# EAGLE board PCB-2.0 v40 (EAGLE 9.7.0)
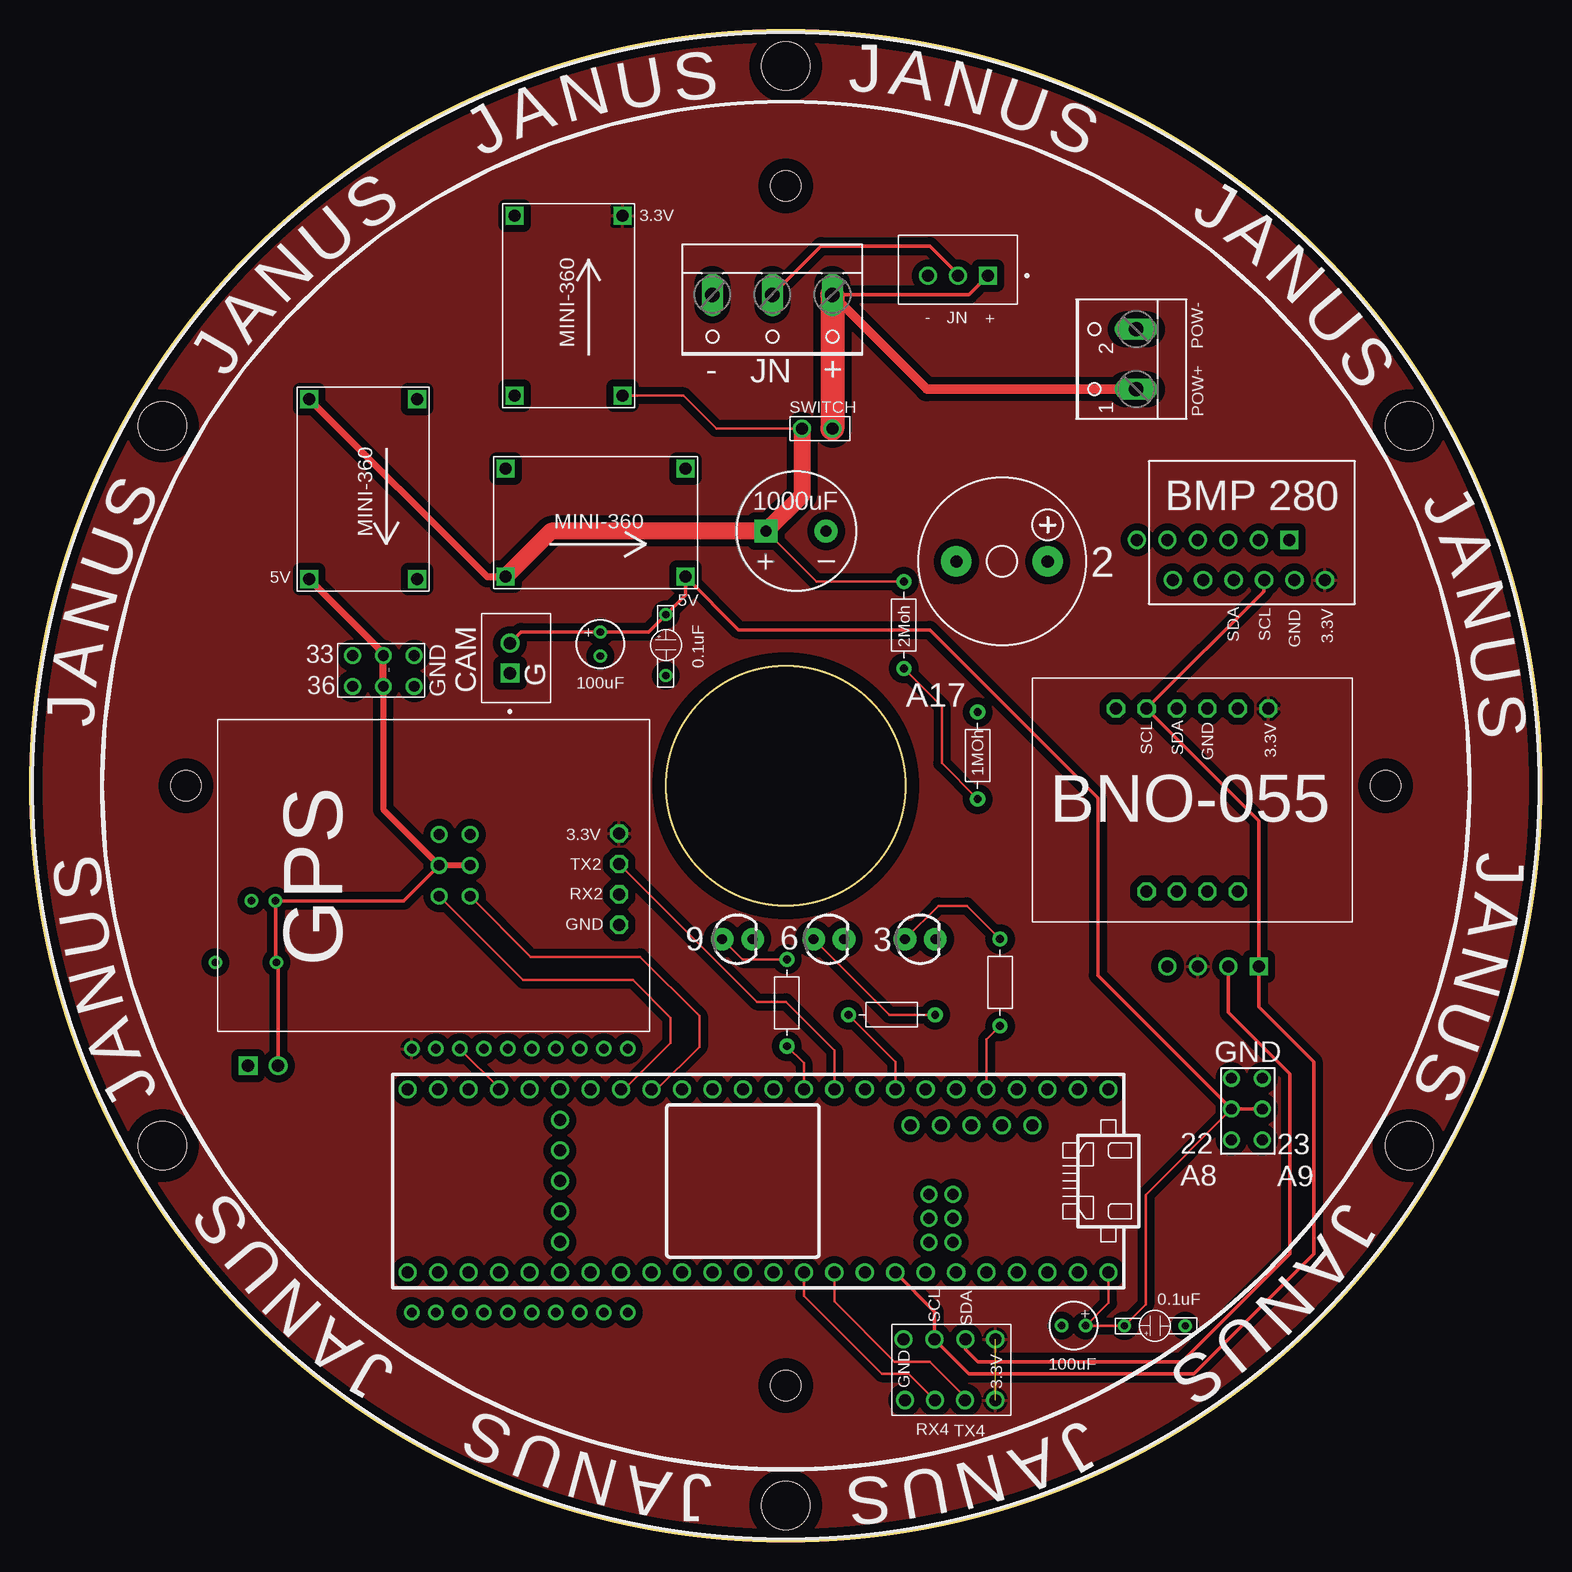
[diagram p0: board, top side]
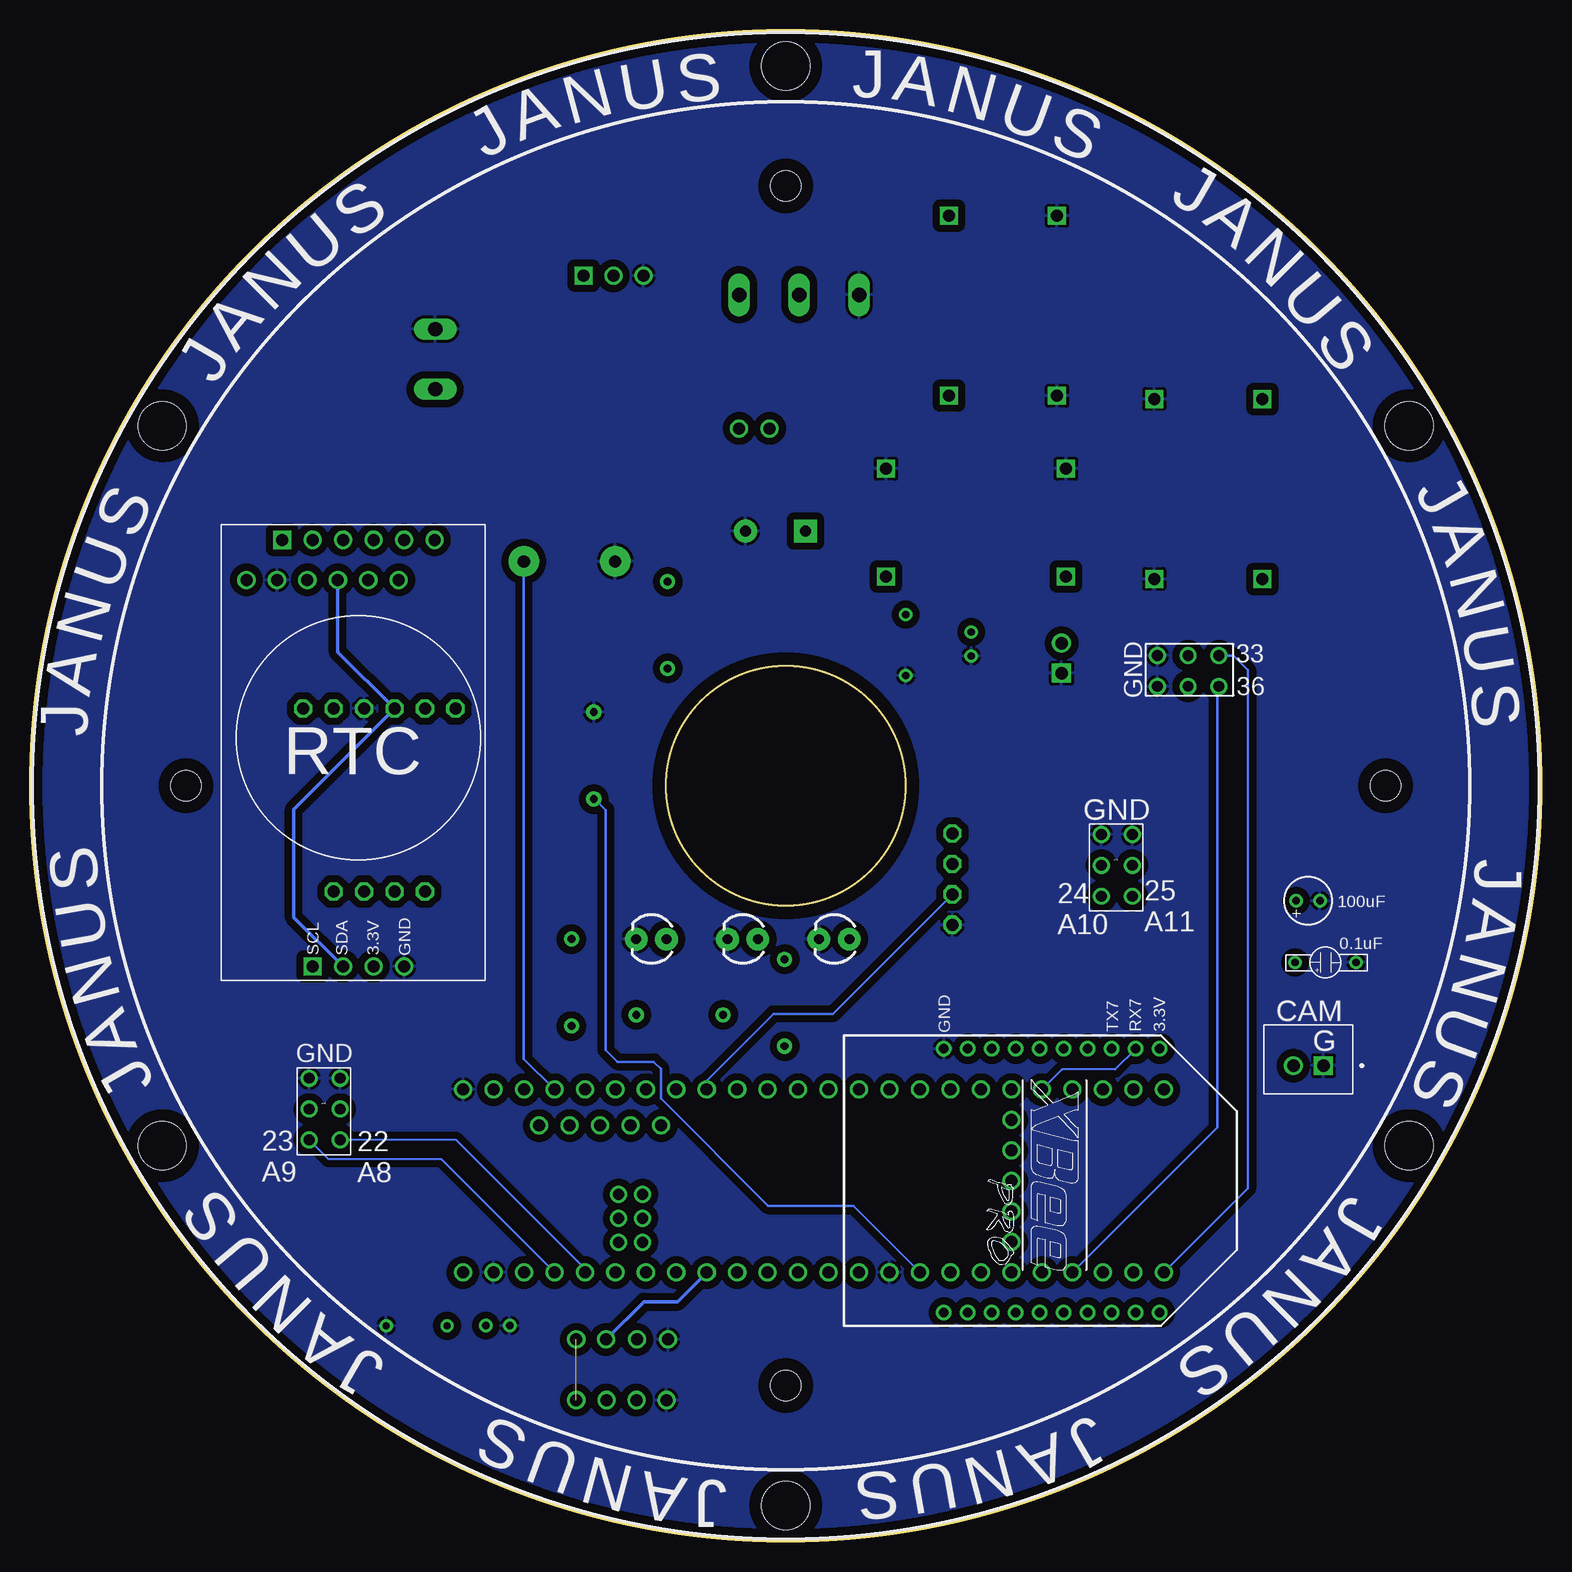
[diagram p1: board, bottom side, seen from below]

Size 126 x 126 mm. Coordinates in mm from the lower left corner, seen from the top.
Outline: circle at 63,63 radius 63
Outline: circle at 63.01,63 radius 10
Copper layers (1*16): Top 0.035mm / dielectric 1.5mm / Bottom 0.035mm
Design rules "default": minimum track width 6mil, minimum drill 0.35mm, track to track 6mil, track to pad 6mil, pad to pad 6mil, via to via 6mil, smd to smd 6mil, copper to edge 40mil, drill to drill 6mil, minimum pad ring 10mil, minimum via ring 8mil, stop-mask expansion 4mil, vias tented up to drill 0mil, thermal gap 10mil
Holes 2.5 mm at 113.01,63 13.01,63 63.01,113 63.01,13
Holes 4 mm at 63.01,123 114.97,93 114.97,33 11.04,93 11.04,33 63.01,3

## Footprints (pad centres in the part's own frame; a part is rotated, then mirrored left to right if it is on the bottom)
CPOL-RADIAL-5MM-10MM-NS = drill 0.9 pad 1.93 square: + 2.5,0 | drill 0.9 pad 1.93: - -2.5,0
LED_3MM = drill 0.813 pad 1.88: A -1.27,0; K 1.27,0
JST_B2B-XH-A(LF)(SN) = drill 1.05 square: 1 1.25,-0.525 | drill 1.05: 2 -1.25,-0.525
JST_B3B-XH-A(LF)(SN) = drill 1 square: 1 2.5,-0.525 | drill 1: 2 0,-0.525; 3 -2.5,-0.525
TEENSY4.1 = drill 1: 0/RX -26.67,-7.62; 1/TX -24.13,-7.62; 2 -21.59,-7.62; 3 -19.05,-7.62; 3V3 6.35,-7.62; 3V3_LO -24.13,7.62; 4 -16.51,-7.62; 5 -13.97,-7.62; 6 -11.43,-7.62; 7 -8.89,-7.62; 8 -6.35,-7.62; 9 -3.81,-7.62; 10/CS -1.27,-7.62; 11/MOSI 1.27,-7.62; 12/MISO 3.81,-7.62; 13/SCK 3.81,7.62; 14/A0 1.27,7.62; 15/A1 -1.27,7.62; 16/A2 -3.81,7.62; 17/A3 -6.35,7.62; 18/A4/SDA -8.89,7.62; 19/A5/SCL -11.43,7.62; 20/A6 -13.97,7.62; 21/A7 -16.51,7.62; 22/A8 -19.05,7.62; 23/A9 -21.59,7.62; 24 8.89,-7.62; 25 11.43,-7.62; 26 13.97,-7.62; 27 16.51,-7.62; 28 19.05,-7.62; 29 21.59,-7.62; 30 24.13,-7.62; 31/A12 26.67,-7.62; 32 29.21,-7.62; 33 29.21,7.62; 34 26.67,7.62; 35 24.13,7.62; 36 21.59,7.62; 37 19.05,7.62; 38 16.51,7.62; 39 13.97,7.62; 40 11.43,7.62; 41 8.89,7.62; AGND -26.67,7.62; GND -29.21,-7.62; GND1 6.35,7.62; GND2 16.51,0; GND-U1 -15.24,-4.62; GND-U2 -12.7,-4.62; PROG 16.51,2.54; RST 16.51,5.08; UD+ -17.78,-4.62; UD- -20.32,-4.62; UVHST -22.86,-4.62; V33 16.51,-2.54; VBAT 16.51,-5.08; VIN -29.21,7.62 | drill 0.9: ELED -16.24,3.12; ER+ -16.24,5.12; ER- -14.24,5.12; ET+ -14.24,1.12; ET- -16.24,1.12; GND-E -14.24,3.12
RESAD724W46L381D178B = drill 0.66 pad 1.26: 1 -3.62,0; 2 3.62,0
F/CM12P = drill 1.016 pad 2.54: + 3.81,0; - -3.81,0
BNO055_SELF = drill 1: CSB 4.54,2; GND 12.16,2; SCL 9.62,2; SD0 2,2; SDA 7.08,2; VCC 14.7,2
GPS = drill 1 octagon: GND 8.89,2.54; RX 13.97,2.54; TX 11.43,2.54; VCC 16.51,2.54
VARY_BUCK = drill 1 square: IN+ 1,1; IN- 1,10; OUT+ 16,1; OUT- 16,10
BNO055 = drill 1 octagon: 3V 9.525,2.54; ADR 12.065,17.78; GND 12.065,2.54; INT 9.525,17.78; PS0 14.605,17.78; PS1 17.145,17.78; RST 19.685,2.54; SCL 14.605,2.54; SDA 17.145,2.54; VIN 6.985,2.54
DS3231_RTC = drill 1: P$1 1.195,11.879; P$2 1.195,9.339; P$3 1.195,6.799; P$5 36.755,9.339; P$6 36.755,6.799; P$7 36.755,4.259; P$8 36.755,11.879; P$9 36.755,14.419 | drill 1 square: P$4 1.195,14.419; P$10 36.755,16.959
2_PIN = drill 1: P$1 0,0; P$2 2.54,0
100UF_ELECTROLYTIC = drill 0.6: + -1,0; - 1,0
0.1UF_CERAMIC = drill 0.6: + -1.27,0; - 3.81,0
332-06 = drill 0.9 pad 1.27: 1 0.54,1.032; 2 0.54,-1.54; 3 -2.032,1.032; 4 -2.032,-1.54; 5 -4.604,1.032; 6 -4.604,-1.54
332-08 = drill 1 pad 1.27: 1 -4.397,-3.794; 2 -4.397,1.254; 3 0.651,-3.794; 4 -1.889,1.254; 5 -1.921,-3.794; 6 0.619,1.254; 7 3.254,-3.794; 8 3.127,1.254
W237-103 = drill 1.194 long: 1 -5,-1.29; 2 0,-1.29; 3 5,-1.29
W237-102 = drill 1.194 long: 1 -2.5,-1.27; 2 2.5,-1.27
XBEE-PRO = drill 0.8 pad 1.27: 1 -11,9; 2 -11,7; 3 -11,5; 4 -11,3; 5 -11,1; 6 -11,-1; 7 -11,-3; 8 -11,-5; 9 -11,-7; 10 -11,-9; 11 11,-9; 12 11,-7; 13 11,-5; 14 11,-3; 15 11,-1; 16 11,1; 17 11,3; 18 11,5; 19 11,7; 20 11,9

## Placement (x,y rotation side)
C1  1000UF-RADIAL-5MM-25V-20%-NO-SILK  [CPOL-RADIAL-5MM-10MM-NS]  63.86,84.23 180 top
D1  [LED_3MM]  74.21,50.22 0 top
D2  [LED_3MM]  66.59,50.22 0 top
D3  [LED_3MM]  58.97,50.22 0 top
J1  B2B-XH-A(LF)(SN)  [JST_B2B-XH-A(LF)(SN)]  19.43,40.19 0 bottom
J2  B2B-XH-A(LF)(SN)  [JST_B2B-XH-A(LF)(SN)]  40.53,73.64 270 top
J3  B3B-XH-A(LF)(SN)  [JST_B3B-XH-A(LF)(SN)]  77.37,106.04 0 top
M1  TEENSY4.1  [TEENSY4.1]  60.7,30.06 180 top
R1  [RESAD724W46L381D178B]  80.87,46.6 90 top
R2  [RESAD724W46L381D178B]  71.84,43.9 0 top
R3  [RESAD724W46L381D178B]  63.09,44.91 90 top
R4  [RESAD724W46L381D178B]  72.85,76.39 270 top
R5  [RESAD724W46L381D178B]  79,65.51 90 top
SG1  F/CM12P  [F/CM12P]  81.03,81.7 0 top
U$1  BMP_280THTOUGHHOLE  [BNO055_SELF]  93.26,78.16 0 top
U$2  GPS  [GPS]  51.66,42.53 90 top
U$3  VARY_BUCK  [VARY_BUCK]  50.39,94.52 90 top
U$4  BNO055  [BNO055]  110.23,71.97 180 top
U$5  VARY_BUCK  [VARY_BUCK]  22.29,96.25 270 top
U$6  VARY_BUCK  [VARY_BUCK]  38.65,79.43 0 top
U$7  DS3231_RTC  [DS3231_RTC]  88.03,46.74 90 bottom
U$9  2_PIN  [2_PIN]  64.34,92.79 0 top
U$10  100UF-ELECTROLYTIC  [100UF_ELECTROLYTIC]  19.46,53.41 0 bottom
U$11  100UF-ELECTROLYTIC  [100UF_ELECTROLYTIC]  87.01,18 180 top
U$12  100UF-ELECTROLYTIC  [100UF_ELECTROLYTIC]  47.54,74.82 270 top
U$16  0.1UF_CERAMIC  [0.1UF_CERAMIC]  19.27,48.27 0 bottom
U$17  0.1UF_CERAMIC  [0.1UF_CERAMIC]  92.49,17.99 0 top
U$18  0.1UF_CERAMIC  [0.1UF_CERAMIC]  53.01,76 270 top
X1  332-06  [332-06]  101.19,34.02 270 bottom
X2  332-06  [332-06]  27.43,72.32 180 top
X3  332-06  [332-06]  35.15,54.34 270 bottom
X4  332-08  [332-08]  76.06,13.04 180 top
X5  [W237-103]  61.89,102.64 180 top
X6  [W237-102]  90.95,98.56 90 top
XB1  XBEE-PRO  [XBEE-PRO]  40.82,30.08 270 bottom

## Library data of the parts
C1 = SparkFun-Capacitors
D1-D3 = SparkFun-LED; PROD_ID: DIO-08794
J1 J2 = 2pin_JST; AVAILABILITY: In Stock; CHECK_PRICES: https://www.snapeda.com/parts/B2B-XH-A(LF)(SN)/JST+Sales+America+Inc./view-part/?ref=eda; DESCRIPTION: Connector Header Through Hole 2 position 0.098 (2.50mm); MF: JST Sales; MP: B2B-XH-A(LF)(SN); PACKAGE: None; PRICE: None; SNAPEDA_LINK: https://www.snapeda.com/parts/B2B-XH-A(LF)(SN)/JST+Sales+America+Inc./view-part/?ref=snap
J3 = 3pin_JST; AVAILABILITY: In Stock; CHECK_PRICES: https://www.snapeda.com/parts/B3B-XH-A(LF)(SN)/JST+Sales+America+Inc./view-part/?ref=eda; DESCRIPTION: Connector Header Through Hole 3 position 0.098 (2.50mm); MF: JST Sales; MP: B3B-XH-A(LF)(SN); PACKAGE: None; PRICE: None; SNAPEDA_LINK: https://www.snapeda.com/parts/B3B-XH-A(LF)(SN)/JST+Sales+America+Inc./view-part/?ref=snap
M1 = teensy4.1.dist
R1-R5 = Resistor; CATEGORY: Resistor; SUB-CATEGORY: Fixed
SG1 = buzzer_roundHole; OC_FARNELL: unknown; OC_NEWARK: unknown
U$1 = BMP_280
U$2 = GPS
U$3 U$5 U$6 = Vary_Buck
U$4 = BNO055_NOHOLE
U$7 = DS3231_RTC
U$9 = 2x1_pin
U$10-U$12 = 100uF_electrolytic
U$16-U$18 = Library
X1-X4 = 6pinConnector
X5 = con-wago-500; MPN: 237-103; OC_FARNELL: unknown; OC_NEWARK: 18M7116
X6 = con-wago-500; MPN: 237-102; OC_FARNELL: unknown; OC_NEWARK: 70K9898
XB1 = xbee; MPN: XBP24-AWI-001; OC_FARNELL: 1337916; OC_NEWARK: 42M2667

## Nets
3.3V: U$1.VCC U$2.VCC U$3.OUT+ U$4.VIN U$7.P$2 X4.1 X4.2 XB1.1
5V_1: J1.2 U$5.OUT+ U$10.+ U$16.+ X2.3 X2.4 X3.3 X3.4
5V_2: J2.2 M1.VIN U$6.OUT+ U$11.+ U$12.+ U$17.+ U$18.+ X1.3 X1.4
BATT+: J3.1 U$9.P$2 X5.1 X6.1
BATT_COMM: J3.2 X5.2
BATT_PWM: M1.41 R4.2 R5.1
BATT_S: C1.+ R4.1 U$3.IN+ U$5.IN+ U$6.IN+ U$9.P$1
BUZZ: M1.2 SG1.+
GND: C1.- D1.K D2.K D3.K J1.1 J2.1 J3.3 M1.AGND M1.GND M1.GND1 R5.2 SG1.- U$1.GND U$2.GND U$3.IN- U$3.OUT- U$4.GND U$5.IN- U$5.OUT- U$6.IN- U$6.OUT- U$7.P$3 U$10.- U$11.- U$12.- U$16.- U$17.- U$18.- X1.5 X1.6 X2.5 X2.6 X3.5 X3.6 X4.7 X4.8 X5.3 X6.2 XB1.10
LED1: M1.3 R1.1
LED2: M1.6 R2.1
LED3: M1.9 R3.1
N$1: D1.A R1.2
N$2: D2.A R2.2
N$3: D3.A R3.2
RX2: M1.7 U$2.TX
RX4: M1.16/A2 X4.6
RX7: M1.28 XB1.2
SCL: M1.19/A5/SCL U$1.SCL U$4.SDA U$7.P$4 X4.3
SDA: M1.18/A4/SDA U$1.SDA U$4.SCL U$7.P$1 X4.5
SEV1: M1.22/A8 X1.1
SEV2: M1.23/A9 X1.2
SEV3: M1.36 X2.1
SEV4: M1.33 X2.2
SEV5: M1.25 X3.1
SEV6: M1.24 X3.2
TX2: M1.8 U$2.RX
TX4: M1.17/A3 X4.4
TX7: M1.29 XB1.3

## Tracks (layer width: path | path; a pad name or v marks a point on that pad's centre or on a via)
3.3V  (1 unrouted)
  pour Top (isolate 0.6): -36.89,-36.9 162.91,-36.9 162.91,162.9 -36.89,162.9
5V_1
  Top 0.3: X3.3 31.16,53.41 U$10.+ 20.46,48.35 U$16.+ 20.68,48.13 J1.2
  Top 0.5: X3.4 X3.3 29.46,61.02 X2.3
  Top 0.6: X2.3 X2.4 29.46,74.07 U$5.OUT+
5V_2
  Top 0.152: 91.21,18 U$17.+
  Top 0.2: 91.21,18 U$11.+ 89.91,19.9 M1.VIN | X1.3 93.01,28.9 93.01,19.77 U$17.+
  Top 0.3: X1.4 X1.3 89.01,47.2 89.01,62 75.01,76 59.08,76 U$6.OUT+ 54.65,78.91 U$18.+ 51.56,75.82 U$12.+ 40.94,75.82 J2.2
BATT+
  Top 0.3: J3.1 78.28,103.93 X5.1
  Top 0.8: X6.1 74.76,96.06 X5.1
  Top 2: X5.1 U$9.P$2
BATT_COMM
  Top 0.3: X5.2 65.96,108 75.01,108 77.37,105.64 J3.2
BATT_PWM
  Top 0.152: R5.1
  Top 0.2: R4.2 76.01,69.62 76.01,64.88 R5.1
  Bottom 0.152: R5.1 78.9,61.89
  Bottom 0.2: 78.9,61.89 78.01,61 78.01,41 77.01,40 74.01,40 73.41,39.4 73.41,36.94 64.46,28 57.37,28 M1.41
BATT_S
  Top 0.2: C1.+ 65.58,80.01 R4.1 | U$3.IN+ 54.49,95.52 57.22,92.79 U$9.P$1
  Top 0.6: U$5.IN+ 38.11,80.43 U$6.IN+
  Top 1.4: U$9.P$1 64.34,87.21 C1.+ 43.45,84.23 U$6.IN+
BUZZ
  Bottom 0.2: SG1.+ 84.84,40.23 M1.2
GND
  pour Bottom (isolate 0.6): -26.89,-26.9 152.91,-26.9 152.91,152.9 -26.89,152.9
LED1
  Top 0.2: R1.1 79.75,41.85 M1.3
LED2
  Top 0.2: R2.1 72.13,39.99 M1.6
LED3
  Top 0.2: R3.1 64.51,39.88 M1.9
N$1
  Top 0.2: D1.A 75.72,53 78.09,53 R1.2
N$2
  Top 0.2: D2.A 71.63,43.9 R2.2
N$3
  Top 0.2: D3.A 59.38,48.53 R3.2
RX2
  Bottom 0.2: U$2.TX 59.08,44 64.01,44 69.59,38.42 M1.7
RX4
  Top 0.2: M1.16/A2 64.51,20.5 71.01,14 73.24,14 X4.6
RX7
  Bottom 0.152: XB1.2 35.55,39.35 39.97,39.35 M1.28
SCL
  Top 0.152: U$1.SCL 102.86,80.14
  Top 0.3: M1.19/A5/SCL 75.41,19.15 X4.3 78.25,14 97.01,14 107.01,24 107.01,40 102.45,44.56 U$7.P$4 102.45,60.06 U$4.SDA 102.86,79.21 102.86,80.14
SDA
  Top 0.3: U$7.P$1 99.91,44.1 105.01,39 105.01,24 96.01,15 79.01,15 77.98,16.02 X4.5
  Bottom 0.152: 69.59,22.42 M1.18/A4/SDA
  Bottom 0.3: X4.5 74.83,20 72.01,20 69.59,22.42 | U$7.P$1 104.01,52.04 104.01,61.04 U$4.SCL 100.34,74.14 U$1.SDA
SEV1
  Bottom 0.152: X1.1 100.11,33.52 90.53,33.52 79.75,22.74 M1.22/A8
SEV2
  Bottom 0.152: X1.2 101.13,31.88 91.73,31.88 M1.23/A9
SEV3
  Bottom 0.2: X2.1 27.01,71.16 27.01,34.54 M1.36
SEV4
  Bottom 0.2: M1.33 24.49,29.43 24.49,72.64 25.7,73.86 X2.2
SEV5
  Top 0.2: X3.1 41.11,46.8 50.26,46.8 53.41,43.65 53.41,41.55 49.54,37.68 M1.25
SEV6
  Top 0.2: X3.2 41.74,48.75 50.86,48.75 55.81,43.8 55.81,41.25 52.24,37.68 M1.24
TX2
  Top 0.2: U$2.RX 60.62,45 63.01,45 67.05,40.96 M1.8
TX4
  Top 0.152: 77.95,12.05 X4.4
  Top 0.2: M1.17/A3 67.05,20.01 72.06,15 75.01,15 77.95,12.05
TX7
  Top 0.152: XB1.3 39.11,37.8 M1.29

## Text on the board
tPlace: J | A | S | N | U | N | U | A | S | J | 3.3V | J | S | A | ____ | _ | U | N | _ | N | - | JN | U | + | A | POW- | S | J | - | JN | + | SWITCH | POW+ | _ | J | ____ | _ | 1000uF | BMP 280 | _ | S | A | ____ | _ | _ | + | U | 5V | 2 | N | 5V | 0.1uF | N | 2Moh | SDA | SCL | GND | 3.3V | U | 100uF | A | 33 | CAM | G | S | GND | A17 | J | 36 | SCL | SDA | GND | 3.3V | 1MOh | BNO-055 | 3.3V | J | TX2 | S | RX2 | A | GND | N | U | 9 | 6 | 3 | GPS | U | N | S | A | GND | J | 22 / A8 | 23 / A9 | J | S | A | U | N | 0.1uF | N | U | SCL | SDA | A | 3.3V | S | J | 100uF | GND | S | RX4 | TX4 | J | A | U | N | N | A | J | S | U
bPlace: A | J | S | N | U | U | N | A | S | J | J | A | S | N | U | U | N | S | A | J | J | A | S | N | U | U | N | 33 | S | 36 | GND | A | J | RTC | J | GND | A | 100uF | S | GND | 3.3V | SDA | SCL | 25 / A11 | 24 / A10 | 0.1uF | U | N | GND | U | CAM | 3.3V | RX7 | TX7 | N | S | G | A | GND | J | 22 / A8 | 23 / A9 | J | S | A | N | U | U | N | S | A | J | J | A | S | N | U | U | S | N | J | A
tValues: A3 | A2